# EAGLE board j5 (EAGLE 5.06)
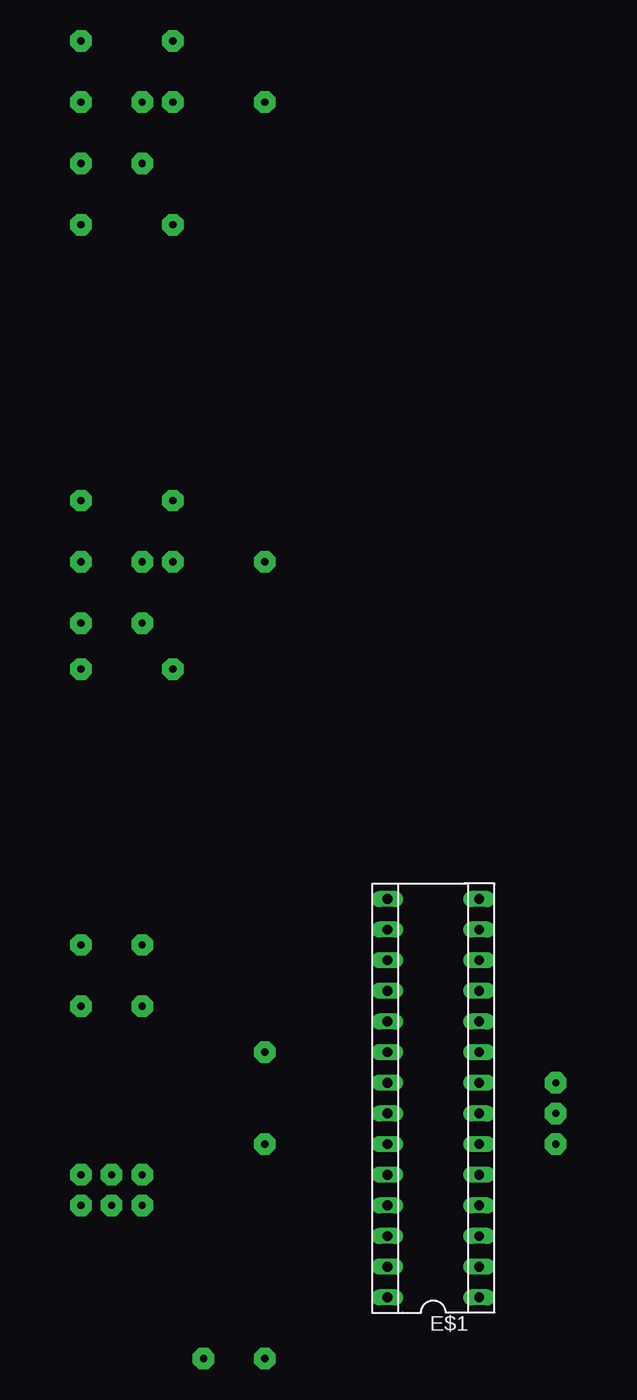
[diagram p0: board, top side]
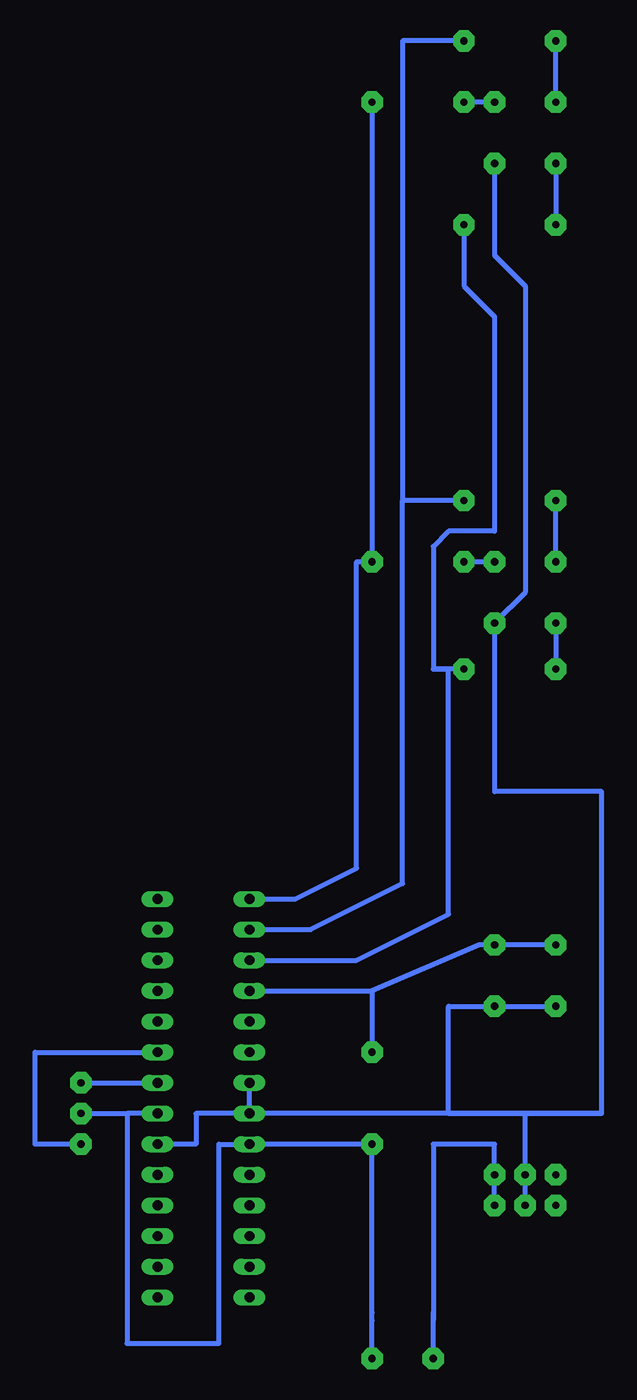
[diagram p1: board, bottom side, seen from below]

No outline drawn. Coordinates in mm, seen from the top.
Copper layers (1*16): Top 0.035mm / dielectric 1.5mm / Bottom 0.035mm
Design rules "default": minimum track width 10mil, minimum drill 24mil, track to track 8mil, track to pad 8mil, pad to pad 8mil, via to via 8mil, smd to smd 8mil, copper to edge 40mil, drill to drill 8mil, minimum pad ring 10mil, minimum via ring 8mil, stop-mask expansion 4mil, vias tented up to drill 0mil, thermal gap 10mil

## Footprints (pad centres in the part's own frame; a part is rotated, then mirrored left to right if it is on the bottom)
SOCKET-28-3 = drill 0.813 long: 1 -16.51,-3.81; 2 -13.97,-3.81; 3 -11.43,-3.81; 4 -8.89,-3.81; 5 -6.35,-3.81; 6 -3.81,-3.81; 7 -1.27,-3.81; 8 1.27,-3.81; 9 3.81,-3.81; 10 6.35,-3.81; 11 8.89,-3.81; 12 11.43,-3.81; 13 13.97,-3.81; 14 16.51,-3.81; 15 16.51,3.81; 16 13.97,3.81; 17 11.43,3.81; 18 8.89,3.81; 19 6.35,3.81; 20 3.81,3.81; 21 1.27,3.81; 22 -1.27,3.81; 23 -3.81,3.81; 24 -6.35,3.81; 25 -8.89,3.81; 26 -11.43,3.81; 27 -13.97,3.81; 28 -16.51,3.81

## Placement (x,y rotation side)
E$1  [SOCKET-28-3]  31.75,64.77 90 top

## Library data of the parts
E$1 = ic-package

## Nets
S$1: E$1.7 E$1.23
S$2: E$1.9
S$4: E$1.18
S$5: E$1.6 E$1.21 E$1.22
S$6: E$1.8
S$11: E$1.17
S$18: E$1.16
S$20: E$1.15

## Tracks (layer width: path | path; a pad name or v marks a point on that pad's centre or on a via)
S$1  (via drill 0.6 pad 1.78)
  Bottom 0.406: E$1.7 38.1,63.5 | 38.1,63.5 38.1,44.45 30.48,44.45 30.48,60.96 E$1.23 v17.78,60.96 17.78,46.99 | 17.78,46.35 17.78,46.99 | v17.78,43.18 17.78,46.99 | v41.91,63.5 38.1,63.5
S$2  (via drill 0.6 pad 1.78)
  Bottom 0.406: v41.91,60.96 45.72,60.96 45.72,68.58 E$1.9
S$3  (via drill 0.6 pad 1.78)
  other vias: 7.62,77.47
S$4  (via drill 0.6 pad 1.78)
  Bottom 0.406: v2.54,77.47 8.89,77.47 17.78,73.66 | 17.78,73.66 v17.78,68.58 | E$1.18 17.78,73.66
S$5  (via drill 0.6 pad 1.78)
  Bottom 0.406: v7.62,142.24 7.62,134.62 5.08,132.08 5.08,106.68 v7.62,104.14 7.62,90.17 -1.27,90.17 -1.27,63.5 | E$1.6 32.38,60.96 32.38,63.5 E$1.22 | E$1.22 E$1.21 | v2.54,72.39 v7.62,72.39 11.43,72.39 11.43,63.5 | -1.27,63.5 E$1.22 | 11.43,63.5 -1.27,63.5 | 11.43,63.5 5.08,63.5 v5.08,55.88
S$6  (via drill 0.6 pad 1.78)
  Bottom 0.406: v41.91,66.04 E$1.8
S$7  (via drill 0.6 pad 1.78)
  Bottom 0.406: v2.54,147.32 v2.54,152.4
S$8  (via drill 0.6 pad 1.78)
  other vias: 2.54,58.42
S$9  (via drill 0.6 pad 1.78)
  other vias: 5.08,58.42
S$10  (via drill 0.6 pad 1.78)
  other vias: 7.62,58.42
S$11  (via drill 0.6 pad 1.78)
  Bottom 0.406: E$1.17 19.05,76.2 11.43,80.01 11.43,100.33 12.7,100.33 | v10.16,137.16 10.16,132.08 7.62,129.54 7.62,111.76 11.43,111.76 12.7,110.49 12.7,100.33 | v10.16,100.33 12.7,100.33
S$12  (via drill 0.6 pad 1.78)
  Bottom 0.406: v7.62,55.88 7.62,60.96 12.7,60.96 12.7,46.99 | 12.7,46.99 12.7,46.35 | v12.7,43.18 12.7,46.99
S$13  (via drill 0.6 pad 1.78)
  other vias: 2.54,55.88
S$14  (via drill 0.6 pad 1.78)
  Bottom 0.406: v2.54,142.24 v2.54,137.16
S$15  (via drill 0.6 pad 1.78)
  Bottom 0.406: v7.62,147.32 v10.16,147.32
S$16  (via drill 0.6 pad 1.78)
  Bottom 0.406: v2.54,104.14 v2.54,100.33
S$17  (via drill 0.6 pad 1.78)
  Bottom 0.406: v7.62,109.22 v10.16,109.22
S$18  (via drill 0.6 pad 1.78)
  Bottom 0.406: E$1.16 22.86,78.74 15.24,82.55 15.24,114.3 | v10.16,152.4 15.24,152.4 15.24,114.3 | v10.16,114.3 15.24,114.3
S$19  (via drill 0.6 pad 1.78)
  Bottom 0.406: v2.54,109.22 v2.54,114.3
S$20  (via drill 0.6 pad 1.78)
  Bottom 0.406: E$1.15 24.13,81.28 19.05,83.82 19.05,109.22 v17.78,109.22 v17.78,147.32